# Altium PCB PCB1.PcbDoc
Units mil, origin at the board's own origin, x right, y up, seen from the top; angles counter-clockwise.
Board outline 6000 x 4000 mil, 2 copper layers (Top Layer, Bottom Layer); 45 components, 30 nets, 492 pads, 9 vias.
Unrouted connection lines stored in the file: 109.
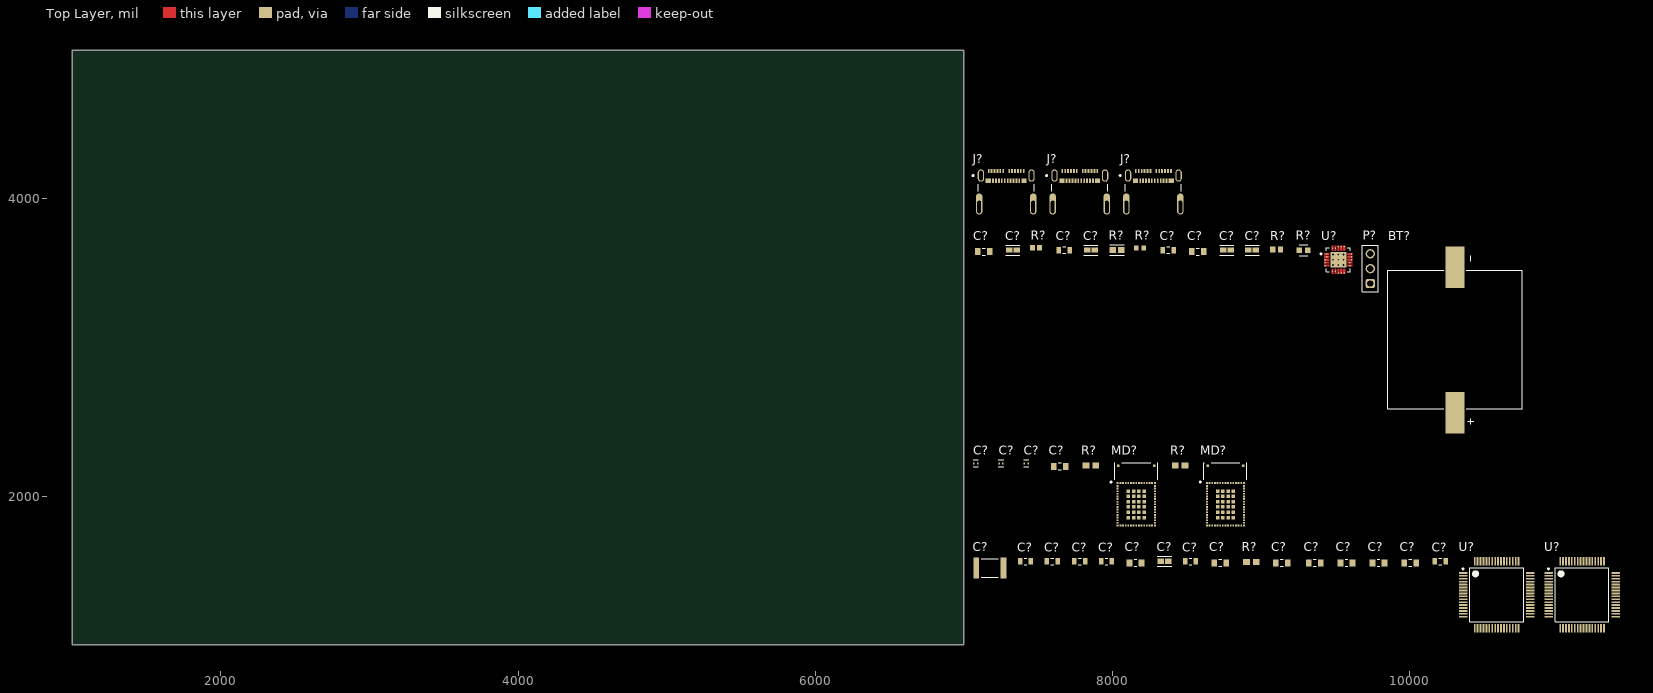
[diagram p0: Top Layer view]
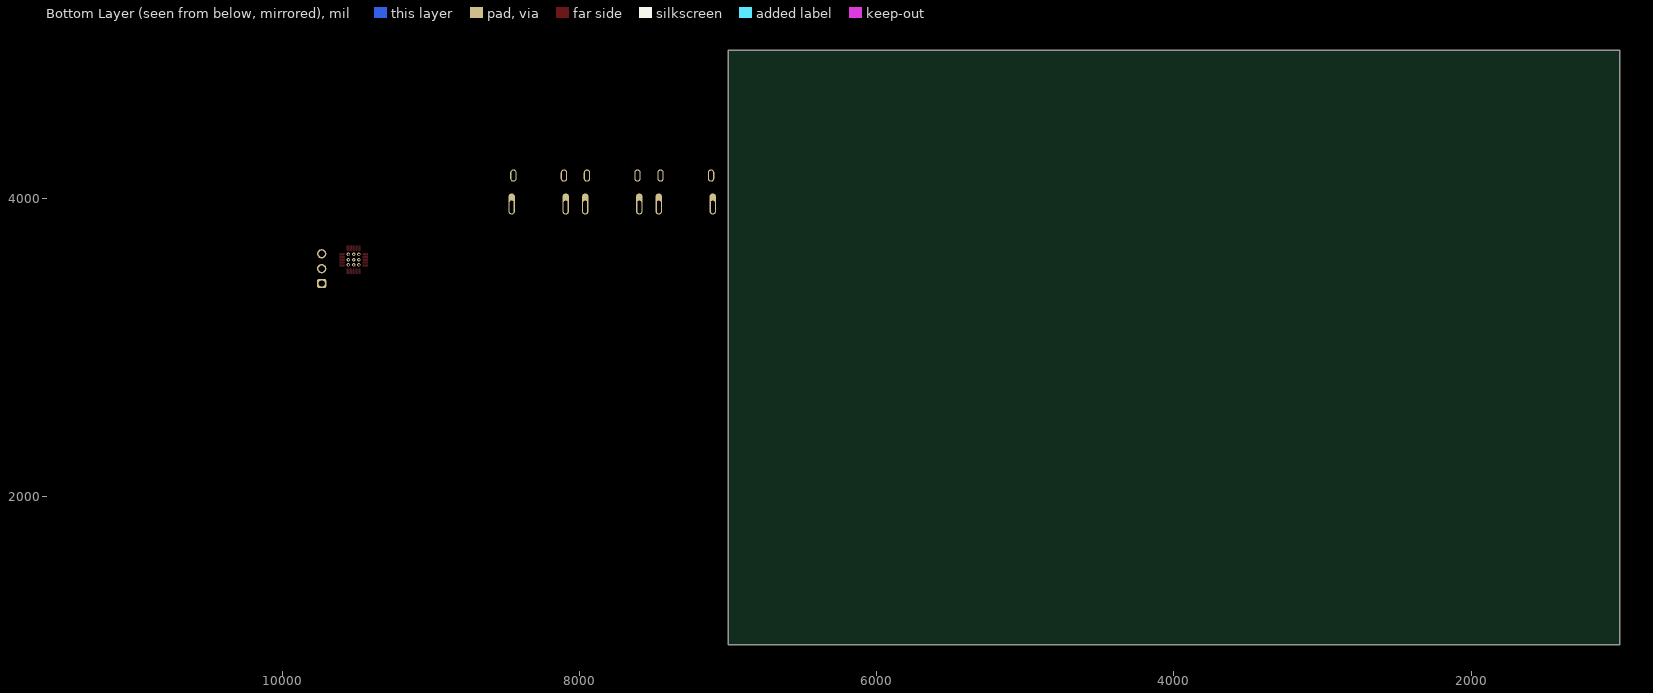
[diagram p1: Bottom Layer view, seen from below]

## Layer stack, top to bottom
Top Solder: solder mask 0.4, Solder Resist, Dk 3.5
Top Layer: signal copper 1.4
Dielectric 1: dielectric 12.6, FR-4, Dk 4.8
Bottom Layer: signal copper 1.4
Bottom Solder: solder mask 0.4, Solder Resist, Dk 3.5

## Board outline
1000,1000 7000,1000 7000,5000 1000,5000

## Design rules (kind name [scope] priority, off if disabled: settings)
Clearance [All] p1: gap=10 ignorepadtopadclearanceinfootprint=FALSE except(0: Arc-Hole Track-Hole SMDPad-Hole THPad-Hole Via-Hole Fill-Hole Poly-Hole Region-Hole Text-Hole)
PolygonConnect [All] p1: connectstyle=Relief reliefconductorwidth=10 reliefentries=4 polygonreliefangle="90 Angle" airgapwidth=10
RoomDefinition USB_C [InComponentClass('USB_C')] p1: confinementstyle=ConfineIn formatcopy=TRUE lockcomponents=FALSE outline 7045,3850 8495,3850 8495,4315 7045,4315
RoutingVias [All] p1: holewidth=28 width=50 viastyle="Through Hole" minholewidth=28 minwidth=50 maxholewidth=28 maxwidth=50
SolderMaskExpansion [All] p1: expansion=4 istentingtop=FALSE
Width [All] p1: maxlimit=10 minlimit=10 preferedwidth=10
30 further rules are at their usual default settings.

## Classes and differential pairs
component class USB_C: J?
component class Power_Supply: BT? C? P? R? U?
component class MCU: C? MD? R?
component class AFE: C? R? U?

## Components (designator, comment, footprint, x,y, rotation, side; value= is the part's Value field where it differs from the comment)
BT? "1063" FP-1063-MFG 10305,3050 r0 top
C? "1uF" FP-CGA3E-0_3-0_1-IPC_B 10205,1560 r0 top
C? "100nF" FP-CGA3E-0_3-0_1-IPC_A 9575,1550 r0 top
C? "100nF" FP-CGA3E-0_3-0_1-IPC_A 9140,1550 r0 top
C? "100nF" FP-CGA3E-0_3-0_1-IPC_A 9360,1550 r0 top
C? "100nF" FP-CGA3E-0_3-0_1-IPC_A 8725,1550 r0 top
C? "100nF" FP-CGA3E-0_3-0_1-IPC_A 8155,1550 r0 top
C? "1uF" FP-CGA3E-0_3-0_1-IPC_B 7780,1560 r0 top
C? "1uF" FP-CGA3E-0_3-0_1-IPC_B 8525,1560 r0 top
C? "100nF" FP-CGA3E-0_3-0_1-IPC_A 10005,1550 r0 top
C? "1uF" FP-CGA3E-0_3-0_1-IPC_B 7415,1560 r0 top
C? "100uF" FP-C4532-280-0_4-IPC_B 7175,1515 r0 top
C? "1uF" FP-CGA3E-0_3-0_1-IPC_B 7595,1560 r0 top
C? "100nF" FP-CGA3E-0_3-0_1-IPC_A 9790,1550 r0 top
C? "10uF" FP-C1608-080-0_1-IPC_B 8350,1560 r0 top
C? "10uF" FP-C1608-080-0_1-IPC_B 7330,3655 r0 top
C? "10nF" FP-CGA3E-0_3-0_1-IPC_B 8375,3655 r0 top
C? "100nF" FP-CGA3E-0_3-0_1-IPC_A 8575,3645 r0 top
C? "100nF" FP-CGA3E-0_3-0_1-IPC_A 7135,3645 r0 top
C? "10nF" FP-CGA3E-0_3-0_1-IPC_B 7675,3655 r0 top
C? "10uF" FP-C1608-080-0_1-IPC_B 8940,3655 r0 top
C? "10uF" FP-C1608-080-0_1-IPC_B 7855,3655 r0 top
C? "3pF" FP-CGA1A-0_1-0_03-IPC_C 7080,2220 r0 top
C? "3pF" FP-CGA1A-0_1-0_03-IPC_C 7250,2220 r0 top
C? "1uF" FP-CGA3E-0_3-0_1-IPC_B 7960,1560 r0 top
C? "10uF" FP-C1608-080-0_1-IPC_B 8770,3655 r0 top
C? "3pF" FP-CGA1A-0_1-0_03-IPC_C 7420,2220 r0 top
C? "100nF" FP-CGA3E-0_3-0_1-IPC_A 7645,2200 r0 top
J? "2012670005" FP-2012670005-MFG 8275,4030 r0 top
J? "2012670005" FP-2012670005-MFG 7285,4030 r0 top
J? "2012670005" FP-2012670005-MFG 7780,4030 r0 top
MD? "STM32WB5MMGH6TR" FP-STM32WB5MMGH6TR-MFG 8160,2005 r0 top
MD? "STM32WB5MMGH6TR" FP-STM32WB5MMGH6TR-MFG 8760,2005 r0 top
P? "61300311121" 61300311121 9735,3530 r90 top
R? "100k" RESC1609X55X30ML10T20 7855,2205 r0 top
R? "1.15k" RESC1608X55X30LL20T20 7485,3670 r0 top
R? "100k" RESC1609X55X30ML10T20 8935,1555 r0 top
R? "100k" RESC1609X55X30ML10T20 8455,2205 r0 top
R? "2k" RESC1609X55X30LL10T20 8185,3670 r0 top
R? "3.57k" FP-ERA3A-IPC_B 8030,3655 r0 top
R? "10.5k" RESC1608X55X30NL20T20 9105,3660 r0 top
R? "CRCW06030000Z0EB" FP-CRCW0603-e3-IPC_B 9285,3655 r0 top
U? "ADS1299IPAG" PAG0064A_N 10585,1335 r0 top
U? "ADS1299IPAG" PAG0064A_N 11160,1335 r0 top
U? "TPS7A8801RTJT" FP-RTJ0020D-MFG 9520,3590 r0 top

## Footprints (in the part's own frame and the unit in brackets; to place one, negate y for a bottom-side part, rotate by r counter-clockwise, add the part's x,y. Pads: shape width x height; smd on the part's side, far side on the other; paste and mask are expansions set on the pad)
61300311121 [mm] "Pin Header, pitch 2.54 mm, THT, Vertical, single row, 3p"
  rrect50% 1.6x1.6 hole 1.1: 1(-2.54,0)
  round 1.6 hole 1.1: 2(0,0) 3(2.54,0)
  silkscreen extent -3.96,-1.35 3.96,1.35, body extent -3.81,-1.27 3.81,1.27, height 8.57
FP-1063-MFG [mm]
  rect 3.17x7.06 smd paste+0 mask+0: 1(0,12.43) 2(0,-12.43)
  silkscreen extent -11.51,-14.43 11.51,14.43, body extent -11.61,-16.16 11.61,16.16, height 0.25
FP-2012670005-MFG [mm]
  rrect100% 1.1x2.1 hole 1.6 slot 0.6 at 0 deg paste-1000 mask+0: 1(-4.32,3.205) 2(4.32,3.205)
  rrect100% 0.6x2.1 hole 2.1 slot 0.6 at 0 deg paste-1000 mask+0: 3(-4.62,-2.155) 4(4.62,-2.155)
  rrect100% 1.1x3.6 smd paste-1000 mask+0: 3(-4.62,-1.655) 4(4.62,-1.655)
  rrect100% 1.1x3.6 smd far side paste-1000 mask+0: 3(-4.62,-1.655) 4(4.62,-1.655)
  rect 0.3x0.7 smd paste+0 mask+0: A1(-3,4.015) A2(-2.5,4.015) A3(-2,4.015) A4(-1.5,4.015) A5(-1,4.015) A6(-0.5,4.015) A7(0.5,4.015) A8(1,4.015) A9(1.5,4.015) A10(2,4.015) A11(2.5,4.015) A12(3,4.015) B2(2.25,2.315) B3(1.75,2.315) B4(1.25,2.315) B5(0.75,2.315) B6(0.25,2.315) B7(-0.25,2.315) B8(-0.75,2.315) B9(-1.25,2.315) B10(-1.75,2.315) B11(-2.25,2.315)
  rect 0.9x0.7 smd paste+0 mask+0: B1(3.05,2.315) B12(-3.05,2.315)
  silkscreen extent -5.79,0.52 4.77,3.33, body extent -5.27,-4.33 5.27,4.46, height 0.25
FP-C1608-080-0_1-IPC_B [mil]
  rect 44.53x35.91 smd paste+0 mask+0: 1(-25.22,0) 2(25.22,0)
  silkscreen extent -47,-34 47,34, body extent -57,-28 57,28, height 10
FP-C4532-280-0_4-IPC_B [mm]
  rect 0.953x3.603 smd paste+0 mask+0: 1(-2.325,0) 2(2.325,0)
  silkscreen extent -1.47,-1.6 1.47,1.6, body extent -3.05,-2.05 3.05,2.05, height 0.25
FP-CGA1A-0_1-0_03-IPC_C [mil]
  rect 11.14x12.52 smd paste+0 mask+0: 1(-12.5,0) 2(12.5,0)
  silkscreen extent -18,-24 18,24, body extent -22,-12 22,12, height 10
FP-CGA3E-0_3-0_1-IPC_A [mm]
  rect 0.956x1.206 smd paste+0 mask+0: 1(-1.025,0) 2(1.025,0)
  silkscreen extent -0.25,-0.6 0.25,0.6, body extent -2,-1.1 2,1.1, height 0.25
FP-CGA3E-0_3-0_1-IPC_B [mm]
  rect 0.756x1.106 smd paste+0 mask+0: 1(-0.925,0) 2(0.925,0)
  silkscreen extent -0.25,-0.55 0.25,0.55, body extent -1.55,-0.8 1.55,0.8, height 0.25
FP-CRCW0603-e3-IPC_B [mil]
  rect 36.81x37.88 smd paste+0 mask+0: 1(-28.17,0) 2(28.17,0)
  silkscreen extent -30,-37 30,35, body extent -56,-29 56,29, height 10
FP-ERA3A-IPC_B [mil]
  rect 41.53x39.61 smd paste+0 mask+0: 1(-28.57,0) 2(28.57,0)
  silkscreen extent -49,-36 49,36, body extent -59,-30 59,30, height 10
FP-RTJ0020D-MFG [mm]
  round 0.252 smd paste-1000 mask+0: 1(-1.975,1) 2(-1.975,0.5) 3(-2.26,0) 4(-2.26,-0.5) 5(-2.26,-1) 6(-1,-1.975) 7(-0.5,-1.975) 8(0,-2.26) 9(0.5,-2.26) 10(1,-2.26) 11(1.975,-1) 12(1.975,-0.5) 13(2.25,0) 14(2.25,0.5) 15(2.25,1) 16(1,2.25) 17(0.5,2.25) 18(0,2.25) 19(-0.5,1.975) 20(-1,1.975)
  rect 2.7x2.7 smd paste-1000 mask+0: 21(0,0)
  Top Layer region: -1.14,2.4 -1.14,1.69 -1.129,1.636 -1.099,1.591 -1.054,1.561 -1,1.55 -1,1.55 -0.946,1.561 -0.901,1.591 -0.871,1.636 -0.86,1.69 -0.86,1.69 -0.86,2.4
  Top Layer region: -0.64,2.4 -0.64,1.69 -0.629,1.636 -0.599,1.591 -0.554,1.561 -0.5,1.55 -0.5,1.55 -0.446,1.561 -0.401,1.591 -0.371,1.636 -0.36,1.69 -0.36,1.69 -0.36,2.4
  Top Layer region: -0.14,2.4 -0.14,1.69 -0.129,1.636 -0.099,1.591 -0.054,1.561 0,1.55 0,1.55 0.054,1.561 0.099,1.591 0.129,1.636 0.14,1.69 0.14,1.69 0.14,2.4
  Top Layer region: 0.36,2.4 0.36,1.69 0.371,1.636 0.401,1.591 0.446,1.561 0.5,1.55 0.5,1.55 0.554,1.561 0.599,1.591 0.629,1.636 0.64,1.69 0.64,1.69 0.64,2.4
  Top Layer region: 0.86,2.4 0.86,1.69 0.871,1.636 0.901,1.591 0.946,1.561 1,1.55 1,1.55 1.054,1.561 1.099,1.591 1.129,1.636 1.14,1.69 1.14,1.69 1.14,2.4
  Top Layer region: 0.86,-2.4 0.86,-1.69 0.871,-1.636 0.901,-1.591 0.946,-1.561 1,-1.55 1,-1.55 1.054,-1.561 1.099,-1.591 1.129,-1.636 1.14,-1.69 1.14,-1.69 1.14,-2.4
  Top Layer region: 0.36,-2.4 0.36,-1.69 0.371,-1.636 0.401,-1.591 0.446,-1.561 0.5,-1.55 0.5,-1.55 0.554,-1.561 0.599,-1.591 0.629,-1.636 0.64,-1.69 0.64,-1.69 0.64,-2.4
  Top Layer region: -0.14,-2.4 -0.14,-1.69 -0.129,-1.636 -0.099,-1.591 -0.054,-1.561 0,-1.55 0,-1.55 0.054,-1.561 0.099,-1.591 0.129,-1.636 0.14,-1.69 0.14,-1.69 0.14,-2.4
  Top Layer region: -0.64,-2.4 -0.64,-1.69 -0.629,-1.636 -0.599,-1.591 -0.554,-1.561 -0.5,-1.55 -0.5,-1.55 -0.446,-1.561 -0.401,-1.591 -0.371,-1.636 -0.36,-1.69 -0.36,-1.69 -0.36,-2.4
  Top Layer region: -1.14,-2.4 -1.14,-1.69 -1.129,-1.636 -1.099,-1.591 -1.054,-1.561 -1,-1.55 -1,-1.55 -0.946,-1.561 -0.901,-1.591 -0.871,-1.636 -0.86,-1.69 -0.86,-1.69 -0.86,-2.4
  Top Layer region: 2.4,0.86 1.69,0.86 1.636,0.871 1.591,0.901 1.561,0.946 1.55,1 1.55,1 1.561,1.054 1.591,1.099 1.636,1.129 1.69,1.14 1.69,1.14 2.4,1.14
  Top Layer region: 2.4,0.36 1.69,0.36 1.636,0.371 1.591,0.401 1.561,0.446 1.55,0.5 1.55,0.5 1.561,0.554 1.591,0.599 1.636,0.629 1.69,0.64 1.69,0.64 2.4,0.64
  Top Layer region: 2.4,-0.14 1.69,-0.14 1.636,-0.129 1.591,-0.099 1.561,-0.054 1.55,0 1.55,0 1.561,0.054 1.591,0.099 1.636,0.129 1.69,0.14 1.69,0.14 2.4,0.14
  Top Layer region: 2.4,-0.64 1.69,-0.64 1.636,-0.629 1.591,-0.599 1.561,-0.554 1.55,-0.5 1.55,-0.5 1.561,-0.446 1.591,-0.401 1.636,-0.371 1.69,-0.36 1.69,-0.36 2.4,-0.36
  Top Layer region: 2.4,-1.14 1.69,-1.14 1.636,-1.129 1.591,-1.099 1.561,-1.054 1.55,-1 1.55,-1 1.561,-0.946 1.591,-0.901 1.636,-0.871 1.69,-0.86 1.69,-0.86 2.4,-0.86
  Top Layer region: -2.4,1.14 -1.69,1.14 -1.636,1.129 -1.591,1.099 -1.561,1.054 -1.55,1 -1.55,1 -1.561,0.946 -1.591,0.901 -1.636,0.871 -1.69,0.86 -1.69,0.86 -2.4,0.86
  Top Layer region: -2.4,0.64 -1.69,0.64 -1.636,0.629 -1.591,0.599 -1.561,0.554 -1.55,0.5 -1.55,0.5 -1.561,0.446 -1.591,0.401 -1.636,0.371 -1.69,0.36 -1.69,0.36 -2.4,0.36
  Top Layer region: -2.4,0.14 -1.69,0.14 -1.636,0.129 -1.591,0.099 -1.561,0.054 -1.55,0 -1.55,0 -1.561,-0.054 -1.591,-0.099 -1.636,-0.129 -1.69,-0.14 -1.69,-0.14 -2.4,-0.14
  Top Layer region: -2.4,-0.36 -1.69,-0.36 -1.636,-0.371 -1.591,-0.401 -1.561,-0.446 -1.55,-0.5 -1.55,-0.5 -1.561,-0.554 -1.591,-0.599 -1.636,-0.629 -1.69,-0.64 -1.69,-0.64 -2.4,-0.64
  Top Layer region: -2.4,-0.86 -1.69,-0.86 -1.636,-0.871 -1.591,-0.901 -1.561,-0.946 -1.55,-1 -1.55,-1 -1.561,-1.054 -1.591,-1.099 -1.636,-1.129 -1.69,-1.14 -1.69,-1.14 -2.4,-1.14
  silkscreen extent -3.1,-2.07 2.07,2.07, body extent -2.5,-2.5 2.5,2.5, height 0.25
FP-STM32WB5MMGH6TR-MFG [mm]
  rect 0.35x0.35 smd paste+0 mask+0: 1(-3.175,2.075) 17(-3.175,-5.175) 31(3.175,-5.175) 47(3.175,2.075)
  rect 0.35x0.3 smd paste+0 mask+0: 2(-3.175,1.6) 3(-3.175,1.15) 4(-3.175,0.7) 5(-3.175,0.25) 6(-3.175,-0.2) 7(-3.175,-0.65) 8(-3.175,-1.1) 9(-3.175,-1.55) 10(-3.175,-2) 11(-3.175,-2.45) 12(-3.175,-2.9) 13(-3.175,-3.35) 14(-3.175,-3.8) 15(-3.175,-4.25) 16(-3.175,-4.7) 32(3.175,-4.7) 33(3.175,-4.25) 34(3.175,-3.8) 35(3.175,-3.35) 36(3.175,-2.9) 37(3.175,-2.45) 38(3.175,-2) 39(3.175,-1.55) 40(3.175,-1.1) 41(3.175,-0.65) 42(3.175,-0.2) 43(3.175,0.25) 44(3.175,0.7) 45(3.175,1.15) 46(3.175,1.6)
  rect 0.3x0.35 smd paste+0 mask+0: 18(-2.7,-5.175) 19(-2.25,-5.175) 20(-1.8,-5.175) 21(-1.35,-5.175) 22(-0.9,-5.175) 23(-0.45,-5.175) 24(0,-5.175) 25(0.45,-5.175) 26(0.9,-5.175) 27(1.35,-5.175) 28(1.8,-5.175) 29(2.25,-5.175) 30(2.7,-5.175) 48(2.7,2.075) 49(2.25,2.075) 50(1.8,2.075) 51(1.35,2.075) 52(0.9,2.075) 53(0.45,2.075) 54(0,2.075) 55(-0.45,2.075) 56(-0.9,2.075) 57(-1.35,2.075) 58(-1.8,2.075) 59(-2.25,2.075) 60(-2.7,2.075)
  rect 0.6x0.6 smd paste+0 mask+0: 61(-1.35,0.7) 62(-1.35,-0.2) 63(-1.35,-1.1) 64(-1.35,-2) 65(-1.35,-2.9) 66(-1.35,-3.8) 67(-0.45,-3.8) 68(0.45,-3.8) 69(1.35,-3.8) 70(1.35,-2.9) 71(1.35,-2) 72(1.35,-1.1) 73(1.35,-0.2) 74(1.35,0.7) 75(0.45,0.7) 76(-0.45,0.7) 77(-0.45,-0.2) 78(-0.45,-1.1) 79(-0.45,-2) 80(-0.45,-2.9) 81(0.45,-2.9) 82(0.45,-2) 83(0.45,-1.1) 84(0.45,-0.2)
  rect 0.43x0.43 smd paste+0 mask+0: 85(-3.05,5.035) 86(3.05,5.035)
  silkscreen extent -4.41,2.13 3.69,5.54, body extent -4.19,-6.04 4.19,6.04, height 0.25
PAG0064A_N [mm] "QFP, 64-Leads, Body 10x10mm, Pitch 0.5mm, IPC Medium Density"
  rrect33% 1.45x0.3 smd: 1(-5.725,3.75) 2(-5.725,3.25) 3(-5.725,2.75) 4(-5.725,2.25) 5(-5.725,1.75) 6(-5.725,1.25) 7(-5.725,0.75) 8(-5.725,0.25) 9(-5.725,-0.25) 10(-5.725,-0.75) 11(-5.725,-1.25) 12(-5.725,-1.75) 13(-5.725,-2.25) 14(-5.725,-2.75) 15(-5.725,-3.25) 16(-5.725,-3.75) 33(5.725,-3.75) 34(5.725,-3.25) 35(5.725,-2.75) 36(5.725,-2.25) 37(5.725,-1.75) 38(5.725,-1.25) 39(5.725,-0.75) 40(5.725,-0.25) 41(5.725,0.25) 42(5.725,0.75) 43(5.725,1.25) 44(5.725,1.75) 45(5.725,2.25) 46(5.725,2.75) 47(5.725,3.25) 48(5.725,3.75)
  rrect33% 0.3x1.45 smd: 17(-3.75,-5.725) 18(-3.25,-5.725) 19(-2.75,-5.725) 20(-2.25,-5.725) 21(-1.75,-5.725) 22(-1.25,-5.725) 23(-0.75,-5.725) 24(-0.25,-5.725) 25(0.25,-5.725) 26(0.75,-5.725) 27(1.25,-5.725) 28(1.75,-5.725) 29(2.25,-5.725) 30(2.75,-5.725) 31(3.25,-5.725) 32(3.75,-5.725) 49(3.75,5.725) 50(3.25,5.725) 51(2.75,5.725) 52(2.25,5.725) 53(1.75,5.725) 54(1.25,5.725) 55(0.75,5.725) 56(0.25,5.725) 57(-0.25,5.725) 58(-0.75,5.725) 59(-1.25,5.725) 60(-1.75,5.725) 61(-2.25,5.725) 62(-2.75,5.725) 63(-3.25,5.725) 64(-3.75,5.725)
  silkscreen extent -5.85,-4.6 4.6,4.6, body extent -6,-6 6,6, height 1.09
RESC1608X55X30LL20T20 [mm] "Chip Resistor, 2-Leads, Body 1.60x0.80mm, IPC High Density"
  rect 0.8x0.9 smd: 1(-0.6,0) 2(0.6,0)
  body extent -0.9,-0.5 0.9,0.5, height 0.55
RESC1608X55X30NL20T20 [mm] "Chip Resistor, 2-Leads, Body 1.60x0.80mm, IPC Medium Density"
  rect 0.9x1 smd: 1(-0.65,0) 2(0.65,0)
  body extent -0.9,-0.5 0.9,0.5, height 0.55
RESC1609X55X30LL10T20 [mm] "Chip Resistor, 2-Leads, Body 1.60x0.85mm, IPC High Density"
  rect 0.75x0.85 smd: 1(-0.625,0) 2(0.625,0)
  body extent -0.85,-0.48 0.85,0.48, height 0.55
RESC1609X55X30ML10T20 [mm] "Chip Resistor, 2-Leads, Body 1.60x0.85mm, IPC Low Density"
  rect 1.15x1.05 smd: 1(-0.825,0) 2(0.825,0)
  body extent -0.85,-0.48 0.85,0.48, height 0.55

## Part data
BT?: library part CMP-19636-000032-1, "BATT HLD COIN 20MM 1 OR 2CEL SMD", Color=Black, Max Operating Temperature=145°C, Min Operating Temperature=-50°C, Package Quantity=1, Body Material=Nylon, Material=Steel, Mount="Surface Mount", Number of Batteries=2, Number of Cells=2, Series=-, Termination=SMD/SMT
C? C? C? C? C? C?: library part CMP-08246-002551-1, "Cap Ceramic 1uF 35V X7R 10% Pad SMD 0603 +125°C Automotive T/R", Case Code (Imperial)=0603, Case Code (Metric)=1608, Dielectric=X7R, Max Operating Temperature=125°C, Min Operating Temperature=-55°C, Package Quantity=4000, Ratings=AEC-Q200, Tolerance=10%, Voltage Rating=35V, Capacitance=1uF, Case/Package=0603, Height=0.8mm, Length=0.063inch, Mount="Surface Mount", Packaging="Tape and Reel", Termination=SMD/SMT, Thickness=0.035inch, Voltage Rating (DC)=35V, Weight=7.1E-05oz, Width=0.031inch
C? C? C? C? C? C? C? C? C? C?: library part CMP-2000-07546-2, "Cap Ceramic 100nF 50V X7R 10% Pad SMD 0603 +125°C Automotive T/R", Case Code (Imperial)=0603, Case Code (Metric)=1608, Dielectric=X7R, Max Operating Temperature=125°C, Min Operating Temperature=-55°C, Package Quantity=1, Ratings=AEC-Q200, Tolerance=10%, Voltage=50V, Capacitance=100nF, Case/Package=0603, Composition=Ceramic, Depth=0.8mm, Height=0.8mm, Lead Free="Lead Free", Length=1.6mm, Mount="Surface Mount", Packaging="Tape and Reel", Radiation Hardening=No, REACH SVHC="No SVHC", Termination=SMD/SMT, Thickness=0.035inch, Voltage Rating=50V, Voltage Rating (DC)=50V, Weight=7.1E-05oz, Width=0.8mm
C?: library part CMP-08246-002633-1, "CAP CER 100UF 6.3V X6S 1812", Case Code (Imperial)=1812, Case Code (Metric)=4532, Dielectric Material=Ceramic, Max Operating Temperature=105°C, Min Operating Temperature=-55°C, Package Quantity=500, Tolerance=20%, Voltage Rating=6.3V, Capacitance=100uF, Case/Package=1812, Lead Free="Lead Free", Length=0.177inch, Mount="Surface Mount", Packaging="Tape and Reel", RoHS Compliant=Yes, Series=C, Thickness=0.122inch, Voltage Rating (DC)=6.3V, Width=0.126inch
C? C? C? C? C?: library part CMP-2000-04979-3, "Multilayer Ceramic Capacitors 10μF ±10% 10V X5R SMD 0603", Case Code (Imperial)=0603, Case Code (Metric)=1608, Dielectric=X5R, Dielectric Material=Ceramic, Max Operating Temperature=85°C, Min Operating Temperature=-55°C, Package Quantity=1, Tolerance=10%, Voltage=10V, Capacitance=10uF, Case/Package=0603, Construction=Flat, Depth=0.8mm, Height=0.8mm, Lead Free="Lead Free", Length=1.6mm, Mount="Surface Mount", Number of Pins=2, Packaging="Tape and Reel", Radiation Hardening=No, REACH SVHC="No SVHC", Resistor Type=Ceramic, RoHS Compliant=Yes, Series=C, Termination=SMD/SMT, Thickness=0.035inch, Voltage Rating=10V, Voltage Rating (DC)=10V, Weight=7.1E-05oz, Width=0.8mm
C? C?: library part CMP-08246-000510-1, "Cap Ceramic 10nF 50V X7R 10% Pad SMD 0603 +125°C Automotive T/R", Case Code (Imperial)=0603, Case Code (Metric)=1608, Dielectric=X7R, Max Operating Temperature=125°C, Min Operating Temperature=-55°C, Package Quantity=4000, Ratings=AEC-Q200, Tolerance=10%, Voltage Rating=50V, Capacitance=10nF, Case/Package=0603, Features="Soft Termination", Height=0.8mm, Length=0.063inch, Mount="Surface Mount", Packaging="Tape and Reel", Termination=SMD/SMT, Thickness=0.035inch, Voltage Rating (DC)=50V, Weight=7.1E-05oz, Width=0.031inch
C? C? C?: library part CMP-08246-000522-1, "Cap Ceramic 3pF 50V C0G 0.25pF Pad SMD 0201 125°C Automotive T/R", Case Code (Imperial)=0201, Case Code (Metric)=0603, Dielectric=C0G, Max Operating Temperature=125°C, Min Operating Temperature=-55°C, Package Quantity=15000, Ratings=AEC-Q200, Voltage Rating=50V, Capacitance=3pF, Case/Package=0201, Composition=Ceramic, Depth=0.3mm, Height=0.3mm, Length=0.6mm, Mount="Surface Mount", Packaging="Tape and Reel", Termination=SMD/SMT, Thickness=0.013inch, Voltage Rating (DC)=50V, Weight=6E-06oz, Width=0.012inch
J? J? J?: library part CMP-04767-000003-1, "CONN RCP USB3.1 TYPEC 24P SMD RA", Current Rating=0.25/1.25/5A, Manufacturer=Molex, Temperature="-40°C to +105°C", Temperature Range High=+105°C, Temperature Range Low=-40°C, Voltage Rating=30V, Automotive=No, Category=Conn, ComponentLink2Description=Datasheet, ComponentLink2URL=https://www.molex.com/webdocs/datasheets/pdf/en-us/2012670005_IO_CONNECTORS.pdf, Conn Orientation="Right Angle", Contact Material=Gold,Nickel, Device Class L1=Connectors, Device Class L2="USB Connectors", Device Class L3=unset, Digikey Description="CONN RCP USB3.1 TYPEC 24P SMD RA", Footprint Url=https://www.molex.com/pdm_docs/sd/2012670005_sd.pdf, Height=3.86mm, Is Female=yes, Lead Free=Yes, Manufacturer Part Number=2012670005, Number Of Contacts=24, Octopart=https://octopart.com/201267-0005-molex-77836528, Package=2012670005, Pitch=0.5mm, RoHS=TRUE, Shielding=true, Usb Standard="USB 3.1"
MD? MD?: library part CMP-12160-000017-1, "ULTRA-LOW-POWER DUAL CORE ARM CO"
P?: library part CMP-1502-01062-2, Color=Black, Contact Resistance=20mΩ, Current Rating=3A, Max Operating Temperature=105°C, Min Operating Temperature=-40°C, Operating Supply Voltage=250V, Connector Type="Male Pin", Contact Material=Copper, Contact Mating Length=5.9944mm, Contact Plating=Gold, Gender=Male, Height=8.94mm, Lead Free="Lead Free", Lead Pitch=2.54mm, Mount="Through Hole", NexarPartId=32855521, Number Of Contacts=3, Number of Pins=3, Number of Positions=3, Number of Rows=1, Orientation=Vertical, Packaging=Bulk, Pitch=2.54mm, REACH SVHC=Unknown, RoHS=Compliant, Termination=Solder, Voltage Rating=250V
R? R? R?: library part CMP-2000-03685-1, "TNPW0603100KBEEA", Manufacturer="Vishay Dale", Part Number=TNPW0603100KBEEA
R?: library part CMP-2000-00888-1, Manufacturer=Panasonic, Part Number=ERA3AEB1151V
R?: library part CMP-2000-03747-1, "Thin Film Resistors - SMD 2Kohms .1% 25ppm", Manufacturer="Vishay Dale", Part Number=TNPW06032K00BEEA
R?: library part CMP-05422-000123-1, "RES SMD 3.57KOHM 0.1% 1/10W 0603", Case Code (Imperial)=0603, Case Code (Metric)=1608, Max Operating Temperature=155°C, Max Power Dissipation=100mW, Min Operating Temperature=-55°C, Package Quantity=5000, Resistance=3.57kR, Resistance Tolerance=0.1%, Resistor Type="Thin Film", Temperature Coefficient=25ppm/°C, Voltage Rating=75V, Case/Package=0603, Contact Plating=Tin, Depth=0.8mm, Features="Automotive AEC-Q200", Height=0.45mm, Lead Free="Lead Free", Length=1.6mm, Mount="Surface Mount", Number of Pins=2, Number of Terminations=2, Packaging="Tape and Reel", Power Rating=100mW, Radiation Hardening=No, REACH SVHC="No SVHC", RoHS Compliant=Yes, Series=ERA-3A, Technology="METAL FILM", Termination=SMD/SMT, Tolerance=0.1%, Voltage Rating (DC)=75V, Width=0.8mm
R?: library part CMP-2000-00877-1, "Thin Film Resistors - SMD 0603 10.5Kohm 0.1% 25ppm", Manufacturer=Panasonic, Part Number=ERA3AEB1052V
R?: library part CMP-2000-03818-2, "RES Thick Film, 0Ω, 0.1W, 0603", Case Code (Imperial)=0603, Case Code (Metric)=1608, Max Operating Temperature=155°C, Max Power Dissipation=100mW, Min Operating Temperature=-55°C, Package Quantity=10000, Resistance=0mR, Temperature Coefficient=100ppm/°C, Tolerance=1%, Voltage Rating=75V, Case/Package=0603, Composition="Thick Film", Contact Plating=Tin, Depth=0.85mm, Features="Automotive AEC-Q200", Height=0.45mm, Lead Free="Lead Free", Length=1.55mm, Military Standard=Not, Number of Pins=2, Number of Terminations=2, Packaging="Tape and Reel", Power Rating=100mW, Radiation Hardening=No, Termination=SMD/SMT, Voltage Rating (DC)=75V, Weight=7.1E-05oz, Width=0.033inch
U? U?: library part CMP-0841-00002-2, "Low-Noise, 8-Channel, 24-Bit Analog Front-End for Biopotential Measurement, 16 KSPS, -40 to 85 degC, 64-Pin PQFP (PAG-64), RoHS, Tube", Manufacturer="Texas Instruments", Operating Temperature Range (C)="-40 to 85", # Input Channels=8, Architecture=Delta-Sigma, ComponentLink1Description="Manufacturer URL", ComponentLink1URL=http://www.ti.com/, ComponentLink2Description=Datasheet, ComponentLink2URL=http://www.ti.com/lit/ds/symlink/ads1299.pdf, ComponentLink3Description="Package Specification", ComponentLink3URL=http://www.ti.com/lit/ml/mtqf006a/mtqf006a.pdf, DatasheetVersion=SBAS499A, Interface="Serial SPI", Mounting Technology="Surface Mount", PackageDescription="64-Pin Plastic Quad Flatpack, Body 10 x 10 mm, Pitch 0.5 mm", PackageReference=PAG-64, PackageVersion=4040282/C, Packing=PAG0064A, PartNumber=ADS1299IPAG, Reference Mode="Int, Ext", Resolution (Bits)=24, RoHS=TRUE, Sample Rate (max) (KSPS)=16
U?: library part CMP-04917-000013-1, "IC REG LINEAR POS ADJ 1A 20QFN", Dropout Voltage=200mV, Manufacturer="Texas Instruments", Max Junction Temp=+125°C, Max Supply Voltage=6.5V, Min Supply Voltage=1.4V, Nominal Supply Current=2mA, Output Current=1A, Output Voltage=0.8-5V, Package=RTJ0020D, Temperature="-40°C to +125°C", Temperature Range Low=-40°C, Accuracy Percentage=1%, Automotive=No, Category=IC, ComponentLink2Description=Datasheet, ComponentLink2URL=http://www.ti.com/lit/ds/symlink/tps7a88.pdf, Device Class L1="Integrated Circuits (ICs)", Device Class L2="Power Management ICs", Device Class L3="Voltage Regulators - Linear", Digikey Description="IC REG LINEAR POS ADJ 1A 20QFN", Height=0.8mm, Ipc Land Pattern Name=QFN50P400X400X75-20, Lead Free=Yes, Manufacturer Part Number=TPS7A8801RTJT, Mouser Description="LDO Voltage Regulators Dual 1A LDO", Number Of Outputs=2, Octopart=https://octopart.com/tps7a8801rtjt-texas+instruments-68059618, Output Type=AdjustableProgrammable, RoHS=TRUE, Standoff Height=0mm, Temperature Range High=+125°C

## Via types
v1: diameter 23.62, hole 11.81, Top Layer to Bottom Layer, 9 vias

## Nets (pads, with @x,y where several pads share a name; then routed paths per layer and width w, separated by ;. In a path a pad name is that pad's centre, name@x,y a point inside that pad or via, vN(x,y) a via of type N, cw(c..) or ccw(c..) an arc to the next point about the centre after c; other vN are vias at no path point)
+5: C?.1@9099.65,1550 C?.1@9319.65,1550 C?.1@9534.65,1550 C?.1@9749.65,1550 C?.1@9964.65,1550 C?.1@10168.58,1560 C?.2@7355.22,3655 P?.2 U?.4@9431.02,3570.32 U?.5@9431.02,3550.63 U?.6@9480.63,3512.24 U?.8@9520,3501.02 U?.19@10476.73,1109.61 U?.21@10516.1,1109.61 U?.22@10535.79,1109.61 U?.54@10634.21,1560.39 U?.56@10594.84,1560.39 U?.59@10535.79,1560.39
GND: BT?.1 C?.1@7094.65,3645 C?.1@7304.78,3655 C?.1@7829.78,3655 C?.1@8324.78,1560 C?.1@8534.65,3645 C?.1@8744.78,3655 C?.1@8914.78,3655 C?.2@7092.5,2220 C?.2@7262.5,2220 C?.2@7266.54,1515 C?.2@7432.5,2220 C?.2@7451.42,1560 C?.2@7631.42,1560 C?.2@7685.35,2200 C?.2@7816.42,1560 C?.2@7996.42,1560 C?.2@8195.35,1550 C?.2@8561.42,1560 C?.2@8765.35,1550 C?.2@9180.35,1550 C?.2@9400.35,1550 C?.2@9615.35,1550 C?.2@9830.35,1550 C?.2@10045.35,1550 C?.2@10241.42,1560 J?.1@8104.92,4156.18 J?.2@8445.08,4156.18 J?.3@8093.11,3945.16 J?.3@8093.11,3964.84 J?.4@8456.89,3945.16 J?.4@8456.89,3964.84 J?.A1@7166.89,4188.07 J?.A12@7403.11,4188.07 J?.B1@7900.08,4121.14 J?.B12@7659.92,4121.14 MD?.5@8035,2014.84 MD?.16@8035,1819.96 MD?.31@8285,1801.26 MD?.57@8106.85,2086.69 MD?.58@8089.13,2086.69 MD?.59@8071.42,2086.69 MD?.60@8053.7,2086.69 MD?.84@8177.72,1997.13 MD?.86@8280.08,2203.23 R?.1@7461.38,3670 R?.1@8160.39,3670 R?.1@8902.52,1555 R?.1@9256.83,3655 R?.2@9313.17,3655 U?.3@9431.02,3590 U?.13@9608.58,3590 U?.20@10496.42,1109.61 U?.23@10555.47,1109.61 U?.25@11169.84,1109.61 U?.32@10732.64,1109.61 U?.33@10810.39,1187.36 U?.49@10732.64,1560.39 U?.51@10693.27,1560.39 U?.53@10653.9,1560.39 U?.57@10575.16,1560.39 U?.58@10555.47,1560.39
NetC?_1: C?.1@7604.65,2200 MD?.10@8035,1926.26
NetC?_2: C?.2@7175.35,3645 U?.7@9500.32,3512.24
NetR?_2: R?.2@8967.48,1555 U?.38@11385.39,1285.79
NetU?_34: U?.34@11385.39,1207.05
NetU?_35: U?.35@11385.39,1226.73
NetU?_36: U?.36@11385.39,1246.42
NetU?_37: U?.37@11385.39,1266.1
NetU?_39: U?.39@11385.39,1305.47
NetU?_40: U?.40@11385.39,1325.16
NetU?_42: U?.42@11385.39,1364.53
NetU?_43: U?.43@11385.39,1384.21
NetU?_44: U?.44@11385.39,1403.9
NetU?_45: U?.45@11385.39,1423.58
NetU?_46: U?.46@11385.39,1443.27
NetU?_47: U?.47@11385.39,1462.95
NetU?_52: U?.52@11248.58,1560.39
PB10: C?.1@7237.5,2220 MD?.47@8885,2086.69
PB11: C?.1@7407.5,2220 MD?.46@8885,2067.99
PC5: C?.1@7067.5,2220 MD?.45@8885,2050.28
SPI_CLK: MD?.21@8706.85,1801.26
SPI_MISO: MD?.20@8689.13,1801.26
SPI_MOSI: MD?.19@8671.42,1801.26
SPI_NCS1: MD?.18@8653.7,1801.26 R?.1@8422.52,2205
SPI_NCS2: MD?.22@8724.57,1801.26 R?.1@7822.52,2205
USB_5V: P?.3
VBAT_6V: BT?.2 C?.2@8795.22,3655 U?.1@9442.24,3629.37 U?.2@9442.24,3609.68 U?.18@9520,3678.58 U?.20@9480.63,3667.76
VDD: C?.1@8488.58,1560 C?.1@8684.65,1550 C?.2@7711.42,3655 C?.2@7880.22,3655 MD?.4@8035,2032.56 MD?.6@8035,1997.13 MD?.15@8035,1837.68 MD?.17@8035,1801.26 MD?.32@8285,1819.96 R?.2@7887.48,2205 R?.2@8058.57,3655 R?.2@8487.48,2205 U?.11@9597.76,3550.63 U?.12@9597.76,3570.32 U?.48@10810.39,1482.64 U?.50@10712.95,1560.39
VREG_5V: C?.2@8411.42,3655 C?.2@8965.22,3655 P?.1 R?.2@9130.59,3660 U?.14@9608.58,3609.68 U?.15@9608.58,3629.37
pads on no net: C?.1@7083.46,1515 C?.1@7378.58,1560 C?.1@7558.58,1560 C?.1@7638.58,3655 C?.1@7743.58,1560 C?.1@7923.58,1560 C?.1@8114.65,1550 C?.1@8338.58,3655 C?.2@8375.22,1560 C?.2@8615.35,3645 J?.1@7114.92,4156.18 J?.1@7609.92,4156.18 J?.2@7455.08,4156.18 J?.2@7950.08,4156.18 J?.3@7103.11,3945.16 J?.3@7103.11,3964.84 J?.3@7598.11,3945.16 J?.3@7598.11,3964.84 J?.4@7466.89,3945.16 J?.4@7466.89,3964.84 J?.4@7961.89,3945.16 J?.4@7961.89,3964.84 J?.A1@7661.89,4188.07 J?.A1@8156.89,4188.07 J?.A2 J?.A3 J?.A4 J?.A5 J?.A6 J?.A7 J?.A8 J?.A9 J?.A10 J?.A11 J?.A12@7898.11,4188.07 J?.A12@8393.11,4188.07 J?.B1@7405.08,4121.14 J?.B1@8395.08,4121.14 J?.B2 J?.B3 J?.B4 J?.B5 J?.B6 J?.B7 J?.B8 J?.B9 J?.B10 J?.B11 J?.B12@7164.92,4121.14 J?.B12@8154.92,4121.14 MD?.1 MD?.2 MD?.3 MD?.4@8635,2032.56 MD?.5@8635,2014.84 MD?.6@8635,1997.13 MD?.7 MD?.8 MD?.9 MD?.10@8635,1926.26 MD?.11 MD?.12 MD?.13 MD?.14 MD?.15@8635,1837.68 MD?.16@8635,1819.96 MD?.17@8635,1801.26 MD?.18@8053.7,1801.26 MD?.19@8071.42,1801.26 MD?.20@8089.13,1801.26 MD?.21@8106.85,1801.26 MD?.22@8124.57,1801.26 MD?.23 MD?.24 MD?.25 MD?.26 MD?.27 MD?.28 MD?.29 MD?.30 MD?.31@8885,1801.26 MD?.32@8885,1819.96 MD?.33 MD?.34 MD?.35 MD?.36 MD?.37 MD?.38 MD?.39 MD?.40 MD?.41 MD?.42 MD?.43 MD?.44 MD?.45@8285,2050.28 MD?.46@8285,2067.99 MD?.47@8285,2086.69 MD?.48 MD?.49 MD?.50 MD?.51 MD?.52 MD?.53 MD?.54 MD?.55 MD?.56 MD?.57@8706.85,2086.69 MD?.58@8689.13,2086.69 MD?.59@8671.42,2086.69 MD?.60@8653.7,2086.69 MD?.61 MD?.62 MD?.63 MD?.64 MD?.65 MD?.66 MD?.67 MD?.68 MD?.69 MD?.70 MD?.71 MD?.72 MD?.73 MD?.74 MD?.75 MD?.76 MD?.77 MD?.78 MD?.79 MD?.80 MD?.81 MD?.82 MD?.83 MD?.84@8777.72,1997.13 MD?.85 MD?.86@8880.08,2203.23 R?.1@8001.43,3655 R?.1@9079.41,3660 R?.2@7508.62,3670 R?.2@8209.61,3670 U?.1@10359.61,1482.64 U?.1@10934.61,1482.64 U?.2@10359.61,1462.95 U?.2@10934.61,1462.95 U?.3@10359.61,1443.27 U?.3@10934.61,1443.27 U?.4@10359.61,1423.58 U?.4@10934.61,1423.58 U?.5@10359.61,1403.9 U?.5@10934.61,1403.9 U?.6@10359.61,1384.21 U?.6@10934.61,1384.21 U?.7@10359.61,1364.53 U?.7@10934.61,1364.53 U?.8@10359.61,1344.84 U?.8@10934.61,1344.84 U?.9 U?.10 U?.11@10359.61,1285.79 U?.11@10934.61,1285.79 U?.12@10359.61,1266.1 U?.12@10934.61,1266.1 U?.13@10359.61,1246.42 U?.13@10934.61,1246.42 U?.14@10359.61,1226.73 U?.14@10934.61,1226.73 U?.15@10359.61,1207.05 U?.15@10934.61,1207.05 U?.16 U?.17 U?.18@10457.05,1109.61 U?.18@11032.05,1109.61 U?.19@9500.32,3667.76 U?.19@11051.73,1109.61 U?.20@11071.42,1109.61 U?.21@9520,3590 U?.21@11091.1,1109.61 U?.22@11110.79,1109.61 U?.23@11130.47,1109.61 U?.24 U?.25@10594.84,1109.61 U?.26 U?.27 U?.28 U?.29 U?.30 U?.31 U?.32@11307.64,1109.61 U?.33@11385.39,1187.36 U?.34@10810.39,1207.05 U?.35@10810.39,1226.73 U?.36@10810.39,1246.42 U?.37@10810.39,1266.1 U?.38@10810.39,1285.79 U?.39@10810.39,1305.47 U?.40@10810.39,1325.16 U?.41 U?.42@10810.39,1364.53 U?.43@10810.39,1384.21 U?.44@10810.39,1403.9 U?.45@10810.39,1423.58 U?.46@10810.39,1443.27 U?.47@10810.39,1462.95 U?.48@11385.39,1482.64 U?.49@11307.64,1560.39 U?.50@11287.95,1560.39 U?.51@11268.27,1560.39 U?.52@10673.58,1560.39 U?.53@11228.9,1560.39 U?.54@11209.21,1560.39 U?.55 U?.56@11169.84,1560.39 U?.57@11150.16,1560.39 U?.58@11130.47,1560.39 U?.59@11110.79,1560.39 U?.60 U?.61 U?.62 U?.63 U?.64
copper on no net:
  other v1: 9484.57,3554.57 9520,3554.57 9555.43,3554.57 9484.57,3590 9520,3590 9555.43,3590 9484.57,3625.43 9520,3625.43 9555.43,3625.43